# Allegro board ccm_status_p0_20170602.brd
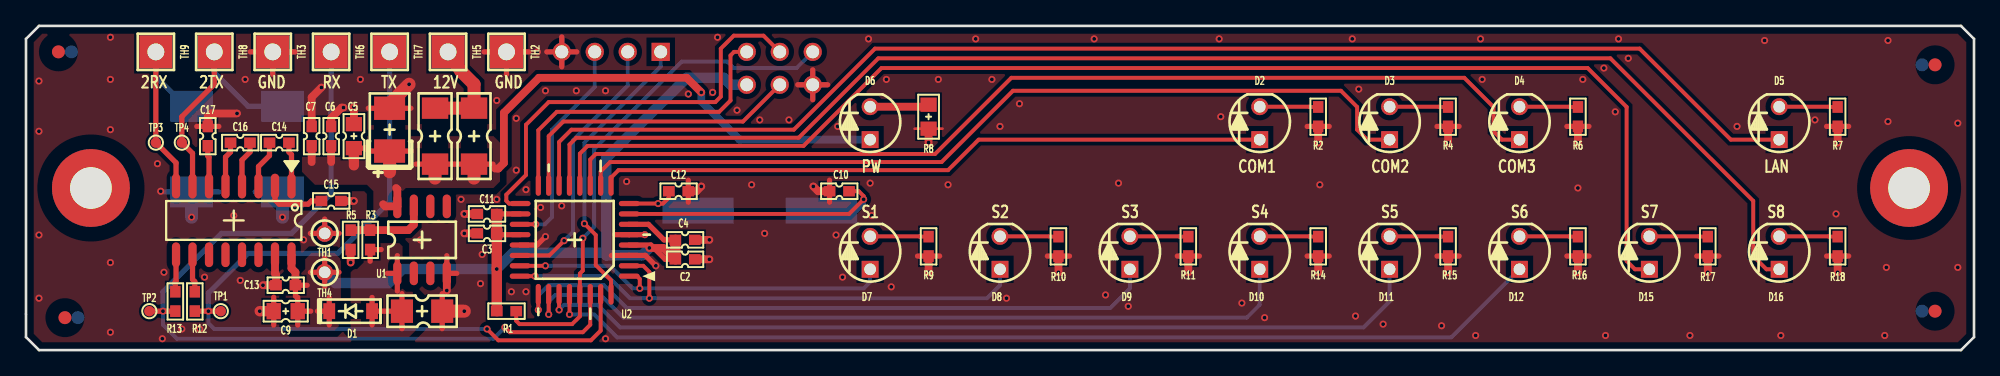
[diagram p0: board, top side]
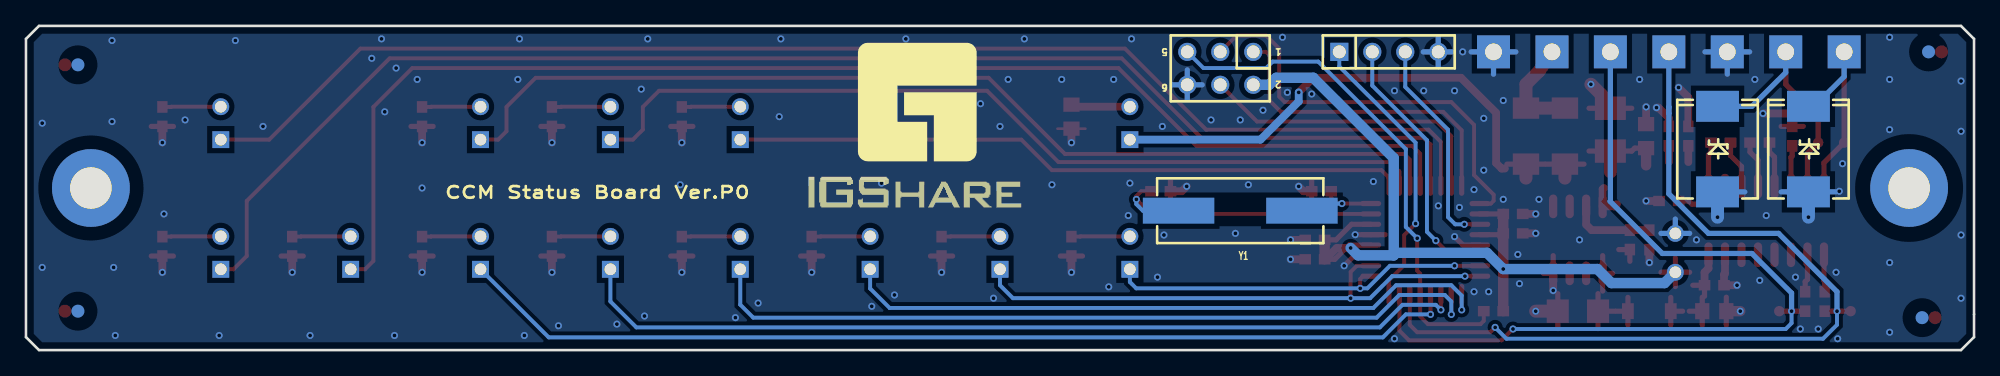
[diagram p1: board, bottom side, seen from below]

Outline 150 x 25 mm; copper layers: TOP, BOTTOM. Coordinates in mm from the lower left corner of the outline.
Outline path: 0,24 0,1 1,0 149,0 150,1 150,24 149,25 1,25 0,24

## Placement (name value [footprint] x y rotation side)
C1  10UF  [TC3528]  28 17 90 top
C2  100nF  [CC1608]  50.75 7 180 top
C3  100nF  [CC1608]  35.5 9 0 top
C4  100nF  [CC1608]  50.75 8.5 180 top
C5  1uF  [CC2012]  25.25 16.5 90 top
C6  100nF  [CC1608]  23.5 16.5 90 top
C7  1nF  [CC1608]  22 16.5 90 top
C8  TCSCS1C685MAAR  [CC3216]  30.5 3 0 top
C9  2.2uF  [CC2012]  20 3 0 top
C10  15pF  [CC1608]  62.62 12.25 180 top
C11  100nF  [CC1608]  35.5 10.5 0 top
C12  15pF  [CC1608]  50.25 12.25 0 top
C13  100nF  [CC1608]  20 5 0 top
C14  100nF  [CC1608]  19.5 16 0 top
C15  100nF  [CC1608]  23.5 11.5 180 top
C16  100nF  [CC1608]  16.5 16 0 top
C17  100nF  [CC1608]  14 16.5 270 top
D1  MMSD4148T1G  [SOD-123]  25 3 180 top
D2  UH30240  [LED_3MM]  95 17.5 180 top
D3  UH30240  [LED_3MM]  105 17.5 180 top
D4  UH30240  [LED_3MM]  115 17.5 180 top
D5  UH30240  [LED_3MM]  135 17.5 180 top
D6  UH30240  [LED_3MM]  65 17.5 180 top
D7  UH30240  [LED_3MM]  65 7.5 180 top
D8  UH30240  [LED_3MM]  75 7.5 180 top
D9  UH30240  [LED_3MM]  85 7.5 180 top
D10  UH30240  [LED_3MM]  95 7.5 180 top
D11  UH30240  [LED_3MM]  105 7.5 180 top
D12  UH30240  [LED_3MM]  115 7.5 180 top
D13  SMDJ15CA  [DO-214AB]  19.75 15.5 90 bottom
D14  SMDJ15CA  [DO-214AB]  12.75 15.5 90 bottom
D15  UH30240  [LED_3MM]  125 7.5 180 top
D16  UH30240  [LED_3MM]  135 7.5 180 top
FB1  BLM41PG181SN1  [BEAD4516]  31.5 16.5 270 top
FB2  BLM41PG181SN1  [BEAD4516]  34.5 16.5 270 top
H1  PCB_HOLE  [HOLE3_2]  5 12.5 0 top
H2  PCB_HOLE  [HOLE3_2]  145 12.5 0 top
J2  2.54mm_Header_2x3  [HEADER2X3_2_54MM]  55.5 23 0 bottom
J10  CON4  [HEADER4]  48.88 23 180 bottom
NOREF  -  [unnamed]  2.5 23 0 top
NOREF#2  -  [#2]  0 2 0 top
NOREF#3  -  [#2]  1 0 90 top
NOREF#4  -  [#2]  16 -23 0 top
NOREF#5  -  [#2]  12 -48 0 top
NOREF#6  -  [unnamed]  147 3 0 top
NOREF#7  -  [#2]  89.75 11 0 top
NOREF#8  -  [unnamed]  3 2.5 0 top
NOREF#9  -  [unnamed]  147 22 0 top
NOREF#10  -  [unnamed]  4 2.5 180 bottom
NOREF#11  -  [unnamed]  146 3 180 bottom
NOREF#12  -  [unnamed]  3.5 23 180 bottom
NOREF#13  -  [unnamed]  146 22 180 bottom
R1  10K  [RC1608]  37 3 180 top
R2  330  [RC1608]  99.5 18 90 top
R3  360K  [RC1608]  26.5 8.5 270 top
R4  330  [RC1608]  109.5 18 90 top
R5  100K  [RC1608]  25 8.5 90 top
R6  330  [RC1608]  119.5 18 90 top
R7  330  [RC1608]  139.5 18 90 top
R8  330  [RC2012]  69.5 18 90 top
R9  330  [RC1608]  69.5 8 90 top
R10  330  [RC1608]  79.5 8 90 top
R11  330  [RC1608]  89.5 8 90 top
R12  0  [RC1608]  13 3.75 270 top
R13  0  [RC1608]  11.5 3.75 270 top
R14  330  [RC1608]  99.5 8 90 top
R15  330  [RC1608]  109.5 8 90 top
R16  330  [RC1608]  119.5 8 90 top
R17  330  [RC1608]  129.5 8 90 top
R18  330  [RC1608]  139.5 8 90 top
TH1  1mm  [1PIN-HDR]  23 9 0 top
TH2  1.3mm  [TP_51]  37 23 0 top
TH3  1.3mm  [TP_51]  19 23 0 top
TH4  1mm  [1PIN-HDR]  23 6 0 top
TH5  1.3mm  [TP_51]  32.5 23 0 top
TH6  1.3mm  [TP_51]  23.5 23 0 top
TH7  1.3mm  [TP_51]  28 23 0 top
TH8  1.3mm  [TP_51]  14.5 23 0 top
TH9  1.3mm  [TP_51]  10 23 0 top
TP1  TX  [TP]  15 3 0 top
TP2  RX  [TP]  9.5 3 0 top
TP3  RS232_RX  [TP]  10 16 0 top
TP4  RS232_TX  [TP]  12 16 0 top
U1  LP2951D  [SOP8_3_9_6_1_27]  30.5 8.5 0 top
U2  ATMEGA48PA  [QFP32_7_9_0_8]  42.25 8.5 180 top
U3  MAX3232CDR_SOIC  [SOP16W6_00P1_270F0_80]  16 10 180 top
Y1  SX-1(8MHz)  [SX-1]  56.5 10.75 180 bottom

## Library data of the parts
C1 = _TC3528
C2-C4 C6 C7 C10-C17 = _CC1608
C5 C9 = _CC2012
C8 = _CC3216
D1 = _SOD-123
D2-D12 D15 D16 = _LED_3MM
D13 D14 = _DO-214AB
FB1 FB2 = _BEAD4516
H1 H2 = _HOLE3_2
J2 = _HEADER2X3_2_54MM
J10 = _HEADER4
R1-R7 R9-R18 = _RC1608
R8 = _RC2012
TH1 TH4 = _1PIN-HDR
TH2 TH3 TH5-TH9 = _TP_51
TP1-TP4 = _TP
U1 = _SOP8_3_9_6_1_27
U2 = _QFP32_7_9_0_8
U3 = _SOP16W6_00P1_270F0_80
Y1 = _SX-1

## Footprints (pads in the part's own frame, mm; a bottom-side part is the same pattern mirrored in y, then rotated)
1PIN-HDR
  round 1.3 hole 0.9: 1(0,0)
BEAD4516
  rect 1.651x2.032 smd: 1(-2.159,0) 2(2.159,0)
CC1608
  rect 0.9x0.8 smd: 1(-0.75,0) 2(0.75,0)
CC2012
  rect 1.1x1.25 smd: 1(-0.925,0) 2(0.925,0)
CC3216
  rect 1.702x1.803 smd: 1(-1.549,0) 2(1.549,0)
DO-214AB
  rect 2.388x3.302 smd: 1(3.3,0) 2(-3.3,0)
HEADER2X3_2_54MM
  round 1.397 hole 0.991: 1(0,0) 2(0,2.54) 3(2.54,0) 4(2.54,2.54) 5(5.08,0) 6(5.08,2.54)
HEADER4
  rect 1.4x1.4 hole 1: 1(0,0)
  round 1.4 hole 1: 2(2.54,0) 3(5.08,0) 4(7.62,0)
HOLE3_2
  round 5.994 hole 3.2: 1(0,0)
LED_3MM
  rect 1.3x1.3 hole 0.9: 1(0,1.27)
  round 1.3 hole 0.9: 2(0,-1.27)
QFP32_7_9_0_8
  oval 1.6x0.4 smd: 1(-4.2,2.8) 2(-4.2,2) 3(-4.2,1.2) 4(-4.2,0.4) 5(-4.2,-0.4) 6(-4.2,-1.2) 7(-4.2,-2) 8(-4.2,-2.8) 17(4.2,-2.8) 18(4.2,-2) 19(4.2,-1.2) 20(4.2,-0.4) 21(4.2,0.4) 22(4.2,1.2) 23(4.2,2) 24(4.2,2.8)
  oval 0.4x1.6 smd: 9(-2.8,-4.2) 10(-2,-4.2) 11(-1.2,-4.2) 12(-0.4,-4.2) 13(0.4,-4.2) 14(1.2,-4.2) 15(2,-4.2) 16(2.8,-4.2) 25(2.8,4.2) 26(2,4.2) 27(1.2,4.2) 28(0.4,4.2) 29(-0.4,4.2) 30(-1.2,4.2) 31(-2,4.2) 32(-2.8,4.2)
RC1608
  rect 0.9x0.8 smd: 1(-0.75,0) 2(0.75,0)
RC2012
  rect 1.1x1.25 smd: 1(-0.925,0) 2(0.925,0)
SOD-123
  rect 0.91x1.22 smd: 1(1.65,0) 2(-1.65,0)
SOP8_3_9_6_1_27
  oval 0.635x1.829 smd: 1(-1.905,-2.583) 2(-0.635,-2.583) 3(0.635,-2.583) 4(1.905,-2.583) 5(1.905,2.583) 6(0.635,2.583) 7(-0.635,2.583) 8(-1.905,2.583)
SOP16W6_00P1_270F0_80
  oval 0.635x1.905 smd: 1(-4.445,-2.65) 2(-3.175,-2.65) 3(-1.905,-2.65) 4(-0.635,-2.65) 5(0.635,-2.65) 6(1.905,-2.65) 7(3.175,-2.65) 8(4.445,-2.65) 9(4.445,2.65) 10(3.175,2.65) 11(1.905,2.65) 12(0.635,2.65) 13(-0.635,2.65) 14(-1.905,2.65) 15(-3.175,2.65) 16(-4.445,2.65)
SX-1
  rect 5.5x2 smd: 1(-4.75,0) 2(4.75,0)
TC3528
  rect 1.803x2.388 smd: 1(-1.651,0) 2(1.651,0)
TP
  round 0.8 smd: 1(0,0)
TP_51
  rect 2.54x2.54 hole 1.295: 1(0,0)
unnamed
  round 1 smd: (0,0)

## Nets
A5.5V: C8.1 D1.2 R3.2 U1.1
D4.9V: C2.2 C3.2 C4.2 C9.2 C11.2 C13.2 D1.1 J2.2 R1.2 TH4.1 U2.4 U2.6 U2.18 U2.20 U3.16
D12V: C1.1 C5.1 C6.1 C7.1 D6.1 FB1.2 FB2.2 U1.8
D12V_IN: FB1.1 FB2.1 TH5.1
GND: C1.2 C2.1 C3.1 C4.1 C5.2 C6.2 C7.2 C8.2 C9.1 C10.2 C11.1 C12.2 C13.1 C15.1 C17.1 D13.2 D14.2 J2.6 J10.4 R2.1 R4.1 R5.1 R6.1 R7.1 R8.1 R9.1 R10.1 R11.1 R14.1 R15.1 R16.1 R17.1 R18.1 TH1.1 TH2.1 TH3.1 U1.4 U2.3 U2.5 U2.21 U3.15
COM1: D2.1 U2.9
COM2: D3.1 U2.10
COM3: D4.1 U2.11
LAN: D5.1 U2.14
LED1: D7.1 U2.1 U2.23
LED2: D8.1 U2.2 U2.24
LED3: D9.1 U2.25
LED4: D10.1 U2.26
LED5: D11.1 U2.27
LED6: D12.1 U2.28
LED7: D15.1 U2.12
LED8: D16.1 U2.13
MISO: J2.1 U2.16
MOSI: J2.4 U2.15
RESERVED0: J10.1 U2.32
RESERVED1: J10.2 U2.22
RESERVED2: J10.3 U2.19
RESET: J2.5 R1.1 U2.29
RS232_RX: D14.1 TH9.1 TP3.1 U3.8
RS232_TX: D13.1 TH8.1 TP4.1 U3.7
RX: R13.2 TH6.1 TP2.1 U2.30
TX: R12.2 TH7.1 TP1.1 U2.31
N16713814: J2.3 U2.17
N16714271: C12.1 U2.8 Y1.2
N16714295: C10.1 U2.7 Y1.1
N16751264: R12.1 U3.10
N16751334: C14.2 U3.1
N16751338: C14.1 U3.3
N16751364: C15.2 U3.2
N16751394: C16.2 U3.4
N16751402: C16.1 U3.5
N16751432: C17.2 U3.6
N16751446: R13.1 U3.9
N16777072: D7.2 R9.2
N16779562: D8.2 R10.2
N16779606: D9.2 R11.2
N16779813: D10.2 R14.2
N16779859: D11.2 R15.2
N16779889: D12.2 R16.2
N16779942: D15.2 R17.2
N16780147: D16.2 R18.2
N16781573: R3.1 R5.2 U1.7
N16782913: D6.2 R8.2
N16785571: D2.2 R2.2
N16785573: D3.2 R4.2
N16785639: D5.2 R7.2
N16786046: D4.2 R6.2

Pads without a net: H1 1; H2 1; U1 2 3 5 6; U3 11 12 13 14

## Via types
v1: diameter 0.55, hole 0.3, TOP to BOTTOM, 155 vias

## Routing (per net, layer and track width the routed paths; a pad name or vN(x,y) marks a point on that pad's centre or on a via; arc(x,y) is an arc through that point)
A5.5V: length 12.3
  TOP w0.4: 26.65,1.94 D1.2 ; D1.2 26.65,4.06 ; D1.2 27.56,3 ; C8.1 28.95,4.35 ; C8.1 27.65,3 ; C8.1 28.95,1.65 ; U1.1 28.59,7.28 ; U1.1 28.59,4.55 ; U1.1 27.83,5.92 ; 26.5,6.85 R3.2 27.35,7.75
D4.9V: length 85.6
  TOP w0.4: TH4.1 23,7.1 ; TH4.1 24.1,6 ; TH4.1 21.9,6 ; TH4.1 23,4.9 ; 21.65,5 C13.2 20.75,4.15 ; C4.2 49.12,8.5 47.92,9.7 U2.6 ; C9.2 21.93,3 ; C9.2 20.93,4.08 ; C9.2 20.93,1.92 ; U2.20 36.35,8.9 C3.2 ; 49.95,7 49.22,7 48.12,8.1 U2.4 ; U2.18 C11.2 ; D1.1 23.35,4.06 ; D1.1 23.35,1.94 ; D1.1 22.44,3
  TOP w0.6: U3.16 20.45,6.3 20.75,6 C13.2 ; C2.2 49.95,7 49.08,7.88 v1(48,7.88)
  TOP w0.8: C2.2 C4.2 ; C11.2 C3.2 v1(36.25,6.25) R1.2
  BOTTOM w0.8: 44.68,7.31 47.43,7.31 v1(48,7.88) ; 44.68,7.31 44.49,7.5 37.5,7.5 v1(36.25,6.25) 29,6.25 27.92,5.17 23.83,5.17 TH4.1 ; 44.68,7.31 44.68,14.81 50.88,21 53.73,21 54.27,20.46 J2.2
D12V: length 57
  TOP w0.4: 33.03,14.34 35.97,14.34 ; C5.1 26.13,15.57 26.36,15.35 C1.1 29.64,15.35 ; 32.97,14.34 30.03,14.34
  TOP w0.6: 28.5,12.5 28.59,12.4 U1.8 27.67,11.08 27.5,11.25 ; v1(52,19.88) 50.88,21 39.5,21 36.8,18.3 36.8,14.42 36.38,14 36.12,14 ; C6.1 23.5,14.5 ; C7.1 22,14.5
  TOP w0.8: C5.1 25.25,14.25
  TOP w1: 28,13.75 C1.1 ; 34.5,14.34 34.5,13.26 ; 31.5,14.34 31.5,13.26
  BOTTOM w0.6: D6.1 54.94,16.23 52,19.17 v1(52,19.88)
D12V_IN: length 8.1
  TOP w1: TH5.1 33.5,21.5 34.5,20.5 FB2.1 FB1.1
GND: length 146.8
  TOP w0.2: 70.58,17.07 R8.1 68.42,17.07
  TOP w0.4: 37,21.28 TH2.1 ; TH2.1 38.72,23 ; TH2.1 35.28,23 ; TH1.1 23,10.1 ; TH1.1 21.9,9 ; TH1.1 24.1,9 ; 14.85,17.25 C17.1 13.15,17.25 ; 51,13.1 C12.2 51,11.4 ; 128.65,7.25 R17.1 130.35,7.25 ; 32.05,4.35 C8.2 32.05,1.65 ; 138.65,17.25 R7.1 140.35,17.25 ; 40.1,23 J10.4 ; J10.4 41.26,24.15 ; J10.4 41.26,21.85 ; J10.4 42.41,23 ; 33.17,5.92 U1.4 32.41,7.28 ; 61.88,11.4 C10.2 61.88,13.1 ; 17.28,23 TH3.1 ; TH3.1 20.72,23 ; TH3.1 19,21.28 ; 118.65,17.25 R6.1 120.35,17.25 ; 19.07,4.08 C9.1 19.07,1.92 ; 26.36,18.65 C1.2 29.64,18.65 ; 108.65,7.25 R15.1 110.35,7.25 ; v1(40,8.75) 39.35,8.1 U2.21 ; 70.35,7.25 R9.1 68.65,7.25 ; 60.58,19.31 J2.6 ; J2.6 61.73,20.46 ; J2.6 59.43,20.46 ; J2.6 60.58,21.61 ; 118.65,7.25 R16.1 120.35,7.25 ; 98.65,17.25 R2.1 100.35,17.25 ; 80.35,7.25 R10.1 78.65,7.25 ; v1(47.65,8.9) U2.5 45.35,8.9 ; 140.35,7.25 R18.1 138.65,7.25 ; 45.08,7.3 U2.3 47.7,7.3 v1(48.5,6.5) ; 100.35,7.25 R14.1 98.65,7.25 ; 88.65,7.25 R11.1 90.35,7.25 ; 108.65,17.25 R4.1 110.35,17.25
  TOP w0.6: v1(52.62,8.5) C4.1 ; v1(52.62,7) C2.1 ; R9.1 v1(69.5,6) ; R14.1 v1(99.5,6) ; R7.1 v1(139.5,16) ; R5.1 v1(25,6.75) ; C5.2 v1(25.25,18.75) ; 69.5,17.25 R8.1 v1(69.5,16) ; R15.1 v1(109.5,6) ; v1(60.62,12.62) 61,12.25 C10.2 ; R6.1 v1(119.5,16) ; U1.4 v1(32.41,4.59) ; R16.1 v1(119.5,6) ; C17.1 14,18 14.25,18.25 v1(16.25,18.25) ; R18.1 v1(139.5,6) ; R10.1 v1(79.5,6) ; C15.1 v1(25.25,11.5) ; C6.2 23.5,17.9 24.3,18.7 v1(24.45,18.7) ; R2.1 v1(99.5,16) ; U3.15 19.18,5.9 19.25,5.83 C13.1 v1(18.25,5) ; C12.2 51.62,12.25 v1(52,12.62) ; R4.1 v1(109.5,16) ; C11.1 v1(33.75,10.5) ; R11.1 v1(89.5,6) ; C7.2 22,19.5 v1(22.75,20.25) ; C3.1 v1(33.75,9) ; R17.1 v1(129.5,6)
  TOP w0.8: C9.1 v1(18,3)
  TOP w1: v1(29.5,20.5) 28,19 C1.2 ; C8.2 v1(33.75,3)
  BOTTOM w0.4: 59.43,20.46 J2.6 ; J2.6 61.73,20.46 ; J2.6 60.58,21.61 ; J2.6 60.58,19.31 ; TH2.1 38.72,23 ; TH2.1 35.28,23 ; TH2.1 37,21.28 ; J10.4 42.41,23 ; J10.4 41.26,24.15 ; J10.4 41.26,21.85 ; J10.4 40.1,23 ; TH1.1 24.1,9 ; TH1.1 23,10.1 ; TH1.1 21.9,9 ; 19,21.28 TH3.1 ; TH3.1 20.72,23 ; TH3.1 17.28,23 ; 17.65,12.2 D13.2 ; 10.65,12.2 D14.2 14.85,12.2
  BOTTOM w1: D14.2 v1(12.75,10.25) ; D13.2 v1(19.75,10.25)
  vias: v1(1,20.75) v1(1,16.88) v1(1,8.88) v1(1,4) v1(6.5,24.12) v1(6.5,20.88) v1(6.5,17) v1(6.5,6.75) v1(6.5,1.38) v1(10.12,14.38) v1(10.38,12.25) v1(10.5,0.88) v1(10.62,6) v1(12,1.62) v1(13.38,1.62) v1(13.75,5.62) v1(16,10.38) v1(16.5,5.38) v1(16.88,20.88) v1(21.38,8.5) v1(25.75,20.88) v1(30.38,8.5) v1(33.5,11.62) v1(35,5.12) v1(35.12,7.38) v1(36.25,19.25) v1(36.25,11.62) v1(37.38,4.5) v1(37.75,17.88) v1(37.75,13.88) v1(38.5,12.38) v1(38.5,4.5) v1(39.38,23) v1(39.62,11) v1(40,20) v1(41.25,11.12) v1(42.38,20) v1(44.62,20) v1(44.62,0.88) v1(46.25,13) v1(51,19.75) v1(52.88,19.88) v1(53.25,24.12) v1(54.75,18.5) v1(55.88,12.75) v1(56.5,17.75) v1(56.88,9) v1(58.75,17.75) v1(62.38,8.88) v1(62.5,17.25) v1(62.88,5.62) v1(64.88,24) v1(65,12.88) v1(65.12,10.38) v1(66.25,20.88) v1(66.62,4.88) v1(70.25,20.88) v1(71,12.75) v1(73.12,24) v1(74.38,20.88) v1(75,17.25) v1(75.5,4) v1(76.5,19) v1(82.25,24) v1(83.12,4.25) v1(84.12,12.88) v1(84.88,3.38) v1(91.88,24) v1(92,18) v1(93.62,3.62) v1(95.38,2.5) v1(99.62,12.75) v1(102.12,24) v1(102.38,2.62) v1(102.62,20.12) v1(104.5,2) v1(109,1.88) v1(111.62,1.12) v1(112,24) v1(112.12,20.88) v1(119.5,12.5) v1(119.88,20.88) v1(121.5,21.75) v1(121.62,1.12) v1(122.38,18.38) v1(122.62,24) v1(123.38,22.5) v1(128.12,1.12) v1(131.75,17.25) v1(133.88,23.88) v1(135.12,1.12) v1(137.75,17.75) v1(139.38,10.5) v1(143.12,1.12) v1(143.25,6.38) v1(143.38,23.88) v1(143.38,17.62) v1(148.75,17.5) v1(148.75,6.38)
COM1: length 51.8
  TOP w0.3: U2.9 45.05,13.3 45.62,13.88 71,13.88 73.36,16.23 D2.1
COM2: length 67
  TOP w0.3: D3.1 103.27,16.23 102.5,17 102.5,18.75 101.25,20 76,20 70.5,14.5 44.97,14.5 44.25,13.78 U2.10
COM3: length 79.2
  TOP w0.3: D4.1 113.64,16.23 113,16.88 113,18.75 110.75,21 75.88,21 70,15.12 43.88,15.12 43.45,14.7 U2.11
LAN: length 103.2
  TOP w0.3: U2.14 41.05,16.05 42,17 59.12,17 65.38,23.25 124.25,23.25 131.27,16.23 D5.1
LED1: length 30.5
  TOP w0.3: U2.1 47.05,5.7 47.26,5.49 v1(47.26,4.76) ; v1(40,6.5) U2.23
  BOTTOM w0.3: v1(40,6.5) 44.97,6.5 46.71,4.76 v1(47.26,4.76) 64.51,4.76 65,5.25 D7.1
LED2: length 43.1
  TOP w0.3: v1(48,4) 48,6.03 47.53,6.5 U2.2 ; U2.24 v1(39.2,5.7)
  BOTTOM w0.3: v1(39.2,5.7) 44.8,5.7 46.5,4 v1(48,4) 74,4 75,5 D8.1
LED3: length 51
  TOP w0.3: U2.25 v1(39.45,3.1)
  BOTTOM w0.3: v1(39.45,3.1) 39.45,4.2 40.25,5 44.5,5 46.25,3.25 83.5,3.25 85,4.75 D9.1
LED4: length 61.4
  TOP w0.3: v1(40.25,2.75) U2.26
  BOTTOM w0.3: D10.1 95,3.5 94,2.5 46,2.5 44.25,4.25 40.75,4.25 40.25,3.75 v1(40.25,2.75)
LED5: length 69.3
  TOP w0.3: v1(41.05,3.1) U2.27
  BOTTOM w0.3: v1(41.05,3.1) 41.44,3.49 44.01,3.49 45.75,1.75 103,1.75 105,3.75 D11.1
LED6: length 77.6
  TOP w0.3: U2.28 v1(41.85,2.75)
  BOTTOM w0.3: D12.1 109.75,0.98 45.52,0.98 43.75,2.75 v1(41.85,2.75)
LED7: length 100.9
  TOP w0.3: U2.12 42.65,15.15 43.25,15.75 59.88,15.75 65.88,21.75 120.25,21.75 123.25,18.75 123.25,6.88 123.89,6.23 D15.1
LED8: length 108.3
  TOP w0.3: D16.1 134.02,6.23 133,7.25 133,11.5 122,22.5 65.62,22.5 59.5,16.38 42.38,16.38 41.85,15.85 U2.13
MISO: length 24.8
  TOP w0.3: U2.16 39.45,16.95 40.88,18.38 53.38,18.38 54.25,19.25 54.25,22.73 54.52,23 J2.1
MOSI: length 23.2
  TOP w0.3: U2.15 40.25,16.5 41.38,17.62 55.2,17.62 J2.4
RESERVED0: length 22
  TOP w0.3: v1(43,9.75) 43.88,8.88 43.88,6.55 45.05,5.38 U2.32
  BOTTOM w0.3: v1(43,9.75) 43,16 48.88,21.88 J10.1
RESERVED1: length 20.4
  TOP w0.3: v1(41.44,8.44) 40.3,7.3 U2.22
  BOTTOM w0.3: v1(41.44,8.44) 42.12,9.12 42.12,16.19 46.34,20.4 J10.2
RESERVED2: length 16.8
  TOP w0.3: U2.19 v1(39.25,9.7)
  BOTTOM w0.3: J10.3 43.8,20.3 40.5,17 40.5,10.25 39.95,9.7 v1(39.25,9.7)
RESET: length 39.7
  TOP w0.3: R1.1 37.75,2.25 38,2 42.05,2 42.65,2.6 U2.29 42.65,5.9 42.88,6.12 v1(42.88,8.62)
  BOTTOM w0.3: J2.5 59.33,21.75 54.5,21.75 54,22.25 50.5,22.25 43.75,15.5 43.75,9.5 v1(42.88,8.62)
RS232_RX: length 16.6
  TOP w0.4: U3.8 11.55,14.45 TP3.1 TH9.1
  BOTTOM w0.4: TH9.1 10,21.09 12.29,18.8 D14.1
RS232_TX: length 19.7
  TOP w0.4: U3.7 12.82,15.18 TP4.1 12,18 14.5,20.5 TH8.1
  BOTTOM w0.4: D13.1 17.1,18.8 14.5,21.4 TH8.1
RX: length 68.5
  TOP w0.3: v1(36.88,1.75) 37.25,1.38 42.88,1.38 43.45,1.95 U2.30
  TOP w0.4: R13.2 v1(10.55,3) TP2.1
  BOTTOM w0.3: v1(36.88,1.75) 36,0.88 11.62,0.88 10.55,1.95 v1(10.55,3)
  BOTTOM w0.4: v1(10.55,3) 10.55,4.5 15.05,9 20.45,9 23.5,12.05 23.5,18.25 ; 23.5,18.25 23.5,18.75 ; 23.5,18.25 23.5,18.25 23.5,18.75 23.5,18.75 ; 23.5,18.75 TH6.1
TX: length 66.6
  TOP w0.3: U2.31 44.25,1.5 43.5,0.75 36.38,0.75 v1(35.5,1.62)
  TOP w0.4: R12.2 v1(14.05,3) TP1.1
  BOTTOM w0.3: v1(35.5,1.62) 14.5,1.62 14.05,2.08 v1(14.05,3)
  BOTTOM w0.4: TH7.1 28,11.5 28.03,11.48 24,7.45 17.1,7.45 14.05,4.4 v1(14.05,3)
N16713814: length 32.7
  TOP w0.3: J2.3 56.79,24.25 54.5,24.25 53.5,23.25 53.5,19.55 53.07,19.12 40.25,19.12 38.5,17.38 38.5,13.5 36.99,11.99 36.99,11.51 37.2,11.3 U2.17
N16714271: length 7
  TOP w0.3: C12.1 49.5,11.75 49.05,11.3 v1(48.67,11.3) U2.8
  BOTTOM w0.3: v1(48.67,11.3) 51.2,11.3 Y1.2
N16714295: length 23.9
  TOP w0.3: U2.7 63.38,10.5 v1(64.5,11.62) 64.5,11.88 64.12,12.25 C10.1
  BOTTOM w0.3: Y1.1 64,10.75 64.5,11.25 v1(64.5,11.62)
N16751264: length 2.9
  TOP w0.4: R12.1 13,5.28 12.82,5.45 U3.10
N16751334: length 3.4
  TOP w0.4: U3.1 20.45,15.08 20.25,15.27 C14.2
N16751338: length 3.7
  TOP w0.4: U3.3 17.91,14.15 18.75,15 C14.1
N16751364: length 4.9
  TOP w0.4: C15.2 21.97,11.5 21.72,11.25 19.5,11.25 19.18,11.57 U3.2
N16751394: length 3.6
  TOP w0.4: C16.2 17.25,15.27 16.64,14.66 U3.4
N16751402: length 3.5
  TOP w0.4: U3.5 15.37,14.89 15.75,15.27 C16.1
N16751432: length 3.1
  TOP w0.4: C17.2 14,14.97 14.1,14.88 U3.6
N16751446: length 2.9
  TOP w0.4: R13.1 11.5,5.28 11.55,5.33 U3.9
N16777072: length 4.5
  TOP w0.3: D7.2 68.8,8.77 68.82,8.75 R9.2
N16779562: length 4.5
  TOP w0.3: D8.2 78.8,8.77 78.82,8.75 R10.2
N16779606: length 4.5
  TOP w0.3: R11.2 88.82,8.75 88.8,8.77 D9.2
N16779813: length 4.5
  TOP w0.3: D10.2 98.8,8.77 98.82,8.75 R14.2
N16779859: length 4.5
  TOP w0.3: R15.2 108.82,8.75 108.8,8.77 D11.2
N16779889: length 4.5
  TOP w0.3: R16.2 118.82,8.75 118.8,8.77 D12.2
N16779942: length 4.5
  TOP w0.3: D15.2 128.8,8.77 128.82,8.75 R17.2
N16780147: length 4.5
  TOP w0.3: D16.2 138.8,8.77 138.82,8.75 R18.2
N16781573: length 6.4
  TOP w0.6: U1.7 29.86,9.67 29.44,9.25 R3.1 R5.2
N16782913: length 4.6
  TOP w0.6: R8.2 69.34,18.77 D6.2
N16785571: length 4.5
  TOP w0.3: D2.2 98.8,18.77 98.82,18.75 R2.2
N16785573: length 4.5
  TOP w0.3: D3.2 108.8,18.77 108.82,18.75 R4.2
N16785639: length 4.5
  TOP w0.3: R7.2 138.82,18.75 138.8,18.77 D5.2
N16786046: length 4.5
  TOP w0.3: R6.2 118.82,18.75 118.8,18.77 D4.2

## Copper pours and planes (outline as drawn; the poured copper is in the pictures)
A5.5V on TOP: 26,8 26,6.75 25.5,6.25 25.25,6.25 25,6 25,1.5 25.5,1 29.5,1 30.25,1.75 30.25,4 29.75,4.5 29.25,4.5 29,4.75 29,8 28.75,8.25 26.25,8.25
D4.9V on TOP: 20,5.5 20,2 20.5,1.5 23.75,1.5 24.25,2 24.25,7 23.75,7.5 22,7.5 21.5,7 21.5,6.25 21,5.75 20.25,5.75
D12V on TOP: 21.25,16.25 21.25,13.75 22.25,12.75 26.25,12.75 26.75,12.25 26.75,10.75 27.25,10.25 28.75,10.25 28.75,12 29.25,12.5 36,12.5 36.5,13 36.5,16 36,16.5 21.5,16.5
GND on TOP: 1.25,0.6 0.6,1.25 0.6,23.75 1.25,24.4 148.75,24.4 149.4,23.75 149.4,1.25 148.75,0.6 ; 9 cut-outs
GND on BOTTOM: 1.25,0.6 0.6,1.25 0.6,23.75 1.25,24.4 148.75,24.4 149.4,23.75 149.4,1.25 148.75,0.6 ; 3 cut-outs

## Text on the board
Ref Des/Silkscreen Top: 2RX | 2TX | GND | RX | TX | 12V | PW | S1 | S2 | S3 | COM1 | S4 | COM2 | S5 | COM3 | S6 | S7 | LAN | S8
User.19: FIGURE | SIZE | 0.30 | 0.90 | 0.99 | 1.00 | 1.30 | 3.20 | DRILL CHART: TOP to BOTTOM | ALL UNITS ARE IN MILLIMETERS | PLATED | QTY | 155 | 13 | 15 | 6 | 4 | 7 | 2
